# Allegro board WaRP7_IO_Rev10_20151118_0911.brd
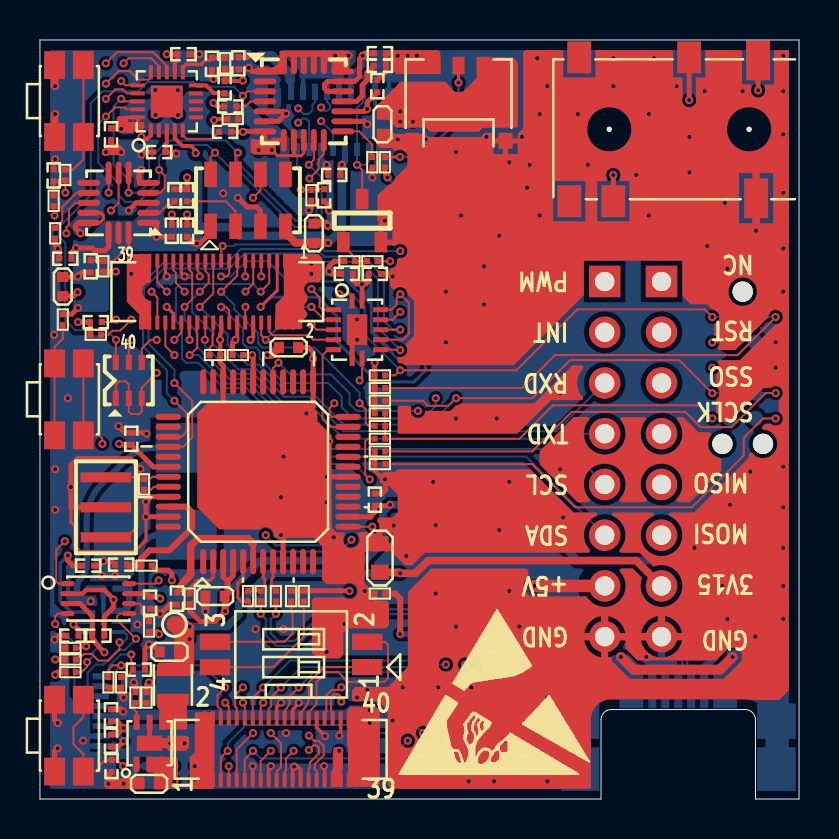
[diagram p0: board, top side]
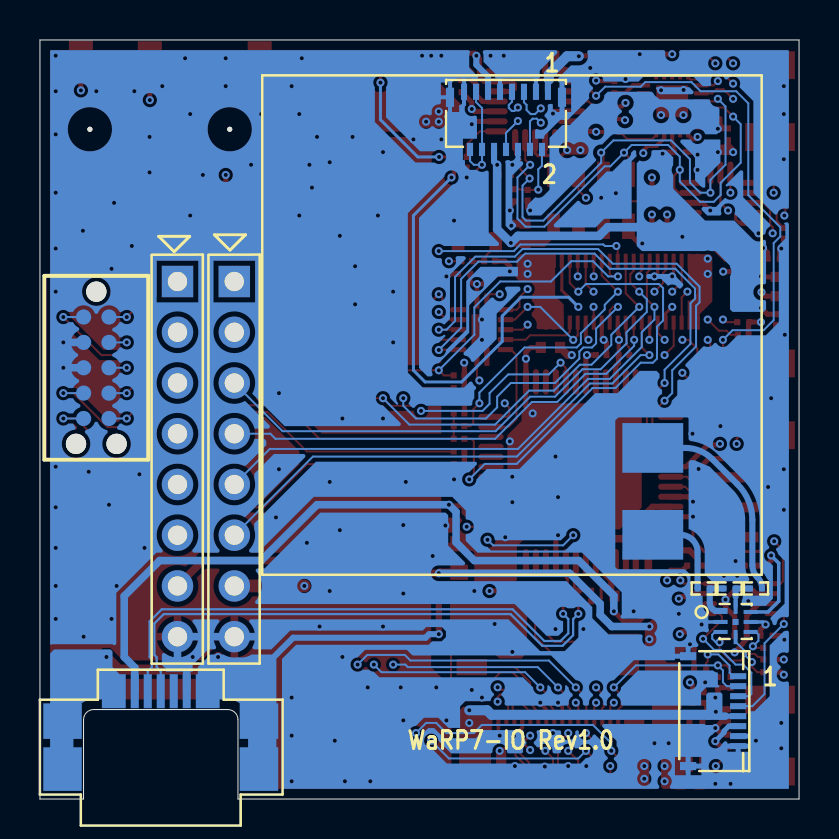
[diagram p1: board, bottom side, seen from below]

Outline 38 x 38 mm; copper layers: TOP, GND02, ART03, ART04, POWER05, BOTTOM. Coordinates in mm from the lower left corner of the outline.
Outline path: 0,38 0,0 28.09,0 28.09,3.97 arc(28.24,4.33) 28.6,4.48 35.31,4.48 arc(35.67,4.33) 35.82,3.97 35.82,0 38,0 38,38 0,38

## Design rules (mm)
net group DIFFPAIR0: nets USB_DN USB_DP
net group DIFFPAIR1: nets N16813663 N16813666
net group I2C: nets I2C4_SCL I2C4_SDA
net group /MISC: nets ACC_INT_B ALT_INT_B AUDIO_SAI1_MCLK AUDIO_SAI1_RXD AUDIO_SAI1_TXC AUDIO_SAI1_TXD AUDIO_SAI1_TXFS BOOT_MODE0 BOOT_MODE1 BYP_CAP DBG_DA DBG_XTIN DBG_XTOUT DEBUG_V50 DSI_RESET FT_RX1 FT_RX2 FT_TX1 FT_TX2 GY_INT_B I2C2_SCL I2C2_SDA I2C3_SCL I2C3_SDA JT_PWR JTAG_MOD JTAG_TCK JTAG_TDI JTAG_TDO JTAG_TMS JTAG_TRST_B MKBUS_ESPI3_MISO MKBUS_ESPI3_MOSI MKBUS_ESPI3_SCLK MKBUS_ESPI3_SS0_B MKBUS_INT MKBUS_PWM2 MKBUS_RST MKBUS_UART5_RXD MKBUS_UART5_TXD NOBAT NTAG_FD_INT PERI_3V15 PMIC_5V0 PMIC_PWR PMIC_PWRON POR_B SENSOR_INT_B SW2_1V8 TOUCH_INT_B TOUCH_RESET_B TOUCH_SCL TOUCH_SDA UART1_RXD UART1_TXD UART2_RXD UART2_TXD USB_SUSPEND1_B USB_SUSPEND2_B USER_PB1
net group /NET: nets N02561 N02599 N02611 N02693 N03151 N03245 N06963 N07207 N07451 N07517 N07733 N07793 N07879 N25723 N42947 N16791037 N16791073 N16799887 N16799903 N16799916 N16800010 N16800012 N16803330 N16803334 N16806132 N16889730
net group /PWR: nets 3V3OUT GND VBAT VREGD
net group AUDIO: nets HPL_OUT HPR_OUT MIC MIC_BIAS N25169

## Placement (name value [footprint] x y rotation side)
ANT1  NFC_ANTENNA  [ANTS2_250X250]  14.37 23.73 270 bottom
C1  10uF  [C0402]  12.45 22.61 0 top
C2  100nF  [C0201]  4.57 18.03 90 top
C3  100nF  [C0201]  16.76 14.99 90 top
C4  100nF  [C0201]  4.06 11.73 180 top
C5  100nF  [C0201]  15.37 26.29 180 top
C6  1uF  [C0201]  16.76 26.29 0 top
C7  4.7uF  [C0402]  8.76 10.16 180 top
C8  100nF  [C0201]  6.86 10.03 270 top
C11  4.7uF  [C0402]  5.46 0.76 180 top
C12  10uF  [C0402]  6.48 7.37 180 top
C13  100nF  [C0201]  2.54 26.67 90 top
C14  4.7uF  [C0402]  1.14 25.65 270 top
C15  100nF  [C0201]  1.27 27.05 180 top
C16  100nF  [C0201]  6.6 28.45 90 top
C17  10uF  [C0402]  13.72 28.32 90 top
C18  100nF  [C0201]  7.37 30.23 90 top
C19  100nF  [C0201]  7.37 28.45 90 top
C20  100nF  [C0201]  6.73 30.23 90 top
C21  100nF  [C0201]  2.79 23.88 180 top
C22  100nF  [C0201]  16.89 35.69 90 top
C23  1uF  [C0201]  17.02 37.34 0 top
C24  100nF  [C0201]  9.53 34.67 180 top
C25  100nF  [C0201]  17.02 36.7 0 top
C26  22uF  [C0603]  17.02 12.06 90 top
C27  100nF  [C0201]  3.56 33.27 270 top
C28  100nF  [C0201]  5.97 32.38 180 top
C29  100nF  [C0201]  9.25 35.64 270 top
C30  100nF  [C0201]  0.69 31.22 90 top
C31  100nF  [C0201]  7.19 37.29 0 top
C32  1uF  [C0201]  8.61 36.8 270 top
C33  100nF  [C0201]  9.27 33.4 0 top
C35  100nF  [C0201]  14.73 31.24 180 top
C36  100nF  [C0201]  3.56 4.19 270 top
C37  100nF  [C0201]  3.56 2.92 90 top
C40  100nF  [C0201]  4.95 6.48 0 top
C41  100nF  [C0201]  9.93 36.83 270 top
C43  100nF  [C0201]  14.22 30.23 270 top
C44  100nF  [C0201]  5.51 9.83 270 top
C45  100nF  [C0201]  2.92 8.18 0 top
C46  10uF  [C0402]  17.14 33.78 270 top
C47  100nF  [C0201]  1.63 8.18 180 top
C48  100pF  [C0201]  4.77 10.54 180 bottom
C49  13pF  [C0201]  3.48 10.54 180 bottom
C50  100pF  [C0201]  2.16 10.54 0 bottom
C51  100nF  [C0201]  2.41 11.68 0 top
C52  100nF  [C0201]  3.58 1.65 270 top
D1  BAT54TW-7-F  [SOT363_6]  4.45 20.95 0 top
J1  CONN_USB_OTG  [USBS5_6PF]  31.95 2.22 180 bottom
J2  CONN_JTAG  [CONS2X5_3J]  35.18 21.59 270 bottom
J3  FH2543-08GT10  [H8M]  31.11 17.02 270 bottom
J4  FH2543-08GT10  [H8M]  28.27 17.02 270 bottom
J5  CONN_AUDIO  [JHP-323S-SMT]  38 33.53 180 top
J7  CONN_DSI  [FPC15_2P6]  14.67 34.25 0 bottom
J8  CONN_TOUCH  [FPC8_2P5]  4.4 4.4 270 bottom
J9  CONN_BAT  [CONS3_2B53X51I]  20.95 34.85 0 top
J10  CONN_B2B1  [FPC2X20_0P4]  12.05 2.49 0 top
J11  CONN_B2B_2  [FPC2X20_0P4]  8.88 25.4 180 top
L1  2.2uH  [L20X16]  6.65 5.71 90 top
NOREF  -  []  -135.8 -70.91 90 top
NOREF#2  -  []  22.86 4.45 0 top
NOREF#3  -  []  -137.8 -68.91 0 top
NOREF#4  -  []  89.42 -56.27 0 top
NOREF#5  -  []  4.63 -11.7 0 top
NOREF#6  -  []  0 0 0 top
NOREF#7  -  []  0 0 90 top
NOREF#8  -  []  0 0 0 top
NOREF#9  -  []  0 0 90 top
Q5  2N7002  [SOT23_123]  16.13 28.96 0 top
R1  470R  [R0201]  5.33 11.68 180 top
R2  27R  [R0201]  11.81 10.16 90 top
R3  27R  [R0201]  11.05 10.16 90 top
R4  1K  [R0201]  10.41 10.16 90 top
R5  0R  [R0201]  17.02 10.29 0 top
R6  1M  [R0201]  5.21 15.75 90 top
R7  10K  [R0201]  9.91 22.23 0 top
R8  10K  [R0201]  7.49 10.03 270 top
R9  10K  [R0201]  17.02 19.3 180 top
R10  10K  [R0201]  17.02 19.94 180 top
R11  10K  [R0201]  17.02 21.21 180 top
R12  0R  [R0201]  17.02 20.57 180 top
R13  430K  [R0201]  5.33 5.08 90 top
R14  0R  [R0201]  17.02 17.4 180 top
R15  4K7  [R0201]  8.76 22.23 0 top
R16  100K  [R0201]  4.78 5.08 270 top
R17  0R  [R0201]  17.02 16.76 180 top
R18  0R  [R0201]  17.02 18.67 0 top
R19  0R  [R0201]  17.02 18.03 0 top
R20  10K  [R0201]  3.17 26.67 270 top
R21  10K  [R0201]  0.76 28.32 270 top
R22  10K  [R0201]  2.79 23.24 180 top
R23  10K  [R0201]  9.65 34.04 0 top
R24  10K  [R0201]  16.64 31.88 270 top
R25  0R  [R0201]  0.69 29.95 90 top
R26  2K2  [R0201]  9.27 36.83 270 top
R27  1K  [R0201]  1.14 24 90 top
R28  10K  [R0201]  3.43 5.84 90 top
R29  10K  [R0201]  4.06 5.84 90 top
R30  10K  [R0201]  13.59 30.23 90 top
R31  10K  [R0201]  5.46 8.64 270 top
R32  100K  [R0201]  1.52 6.35 180 top
R33  2K2  [R0201]  1.52 7.57 180 top
R34  2K2  [R0201]  1.52 6.99 180 top
R35  10K  [R0201]  17.27 31.88 270 top
R36  1K  [R0201]  13.21 10.16 90 top
R37  1K  [R0201]  12.57 10.16 90 top
R38  10K  [R0201]  15.49 26.92 180 top
R39  2K2  [R0201]  16.64 26.92 0 top
R40  1K  [R0201]  1.27 31.24 90 top
S1  EVQP7A01P  [SW4B35X28R]  1.45 34.94 90 top
S2  EVQP7A01P  [SW4B35X28R]  1.45 20.01 90 top
S3  EVQP7A01P  [SW4B35X28R]  1.45 3.17 90 top
SW1  GDH02S04  [SWS4JV]  12.57 8.51 90 top
TP1  TPAD_030  [TP30]  6.73 8.74 90 top
U1  74LVC125ABQ-Q100  [QFN14_1PCQ]  15.88 23.5 270 top
U2  FT2232D  [QFP48P5J]  10.92 16.38 90 top
U3  AP3417CDNTR-G1  [DFN6_1FN]  5.49 2.79 0 top
U4  MPL3115A2  [LGA8IR]  10.41 29.97 90 top
U5  FXOS8700CQR1  [QFNASY16P5R]  3.94 29.84 180 top
U6  FXAS21002CQR1  [QFNASY24P5M]  13.21 34.92 0 top
U7  SGTL5000XNLA3/R2  [QFN20_1PBR]  6.35 34.92 90 top
U8  TXS0102DCUR  [SSOP8CR]  2.92 10.03 0 top
U9  NT3H1101W0FHK  [QFN8_1PCQ]  3.17 8.86 180 bottom
Y1  6.0MHZ  [X3S45X20]  3.3 14.61 270 top

## Library data of the parts
ANT1 = NFC_ANTENNA_0
C1-C8 C11-C33 C35-C37 C40 C41 C43-C52 = CAP NP
D1 = BAT54TW
J1 = USB_MICRO_1
J2 = H10_SMT_1
J3 J4 = HDR1X8
J5 = JACK_JHP-323S-SMT
J7 = FPC15_0
J8 = 2X20PTS TSM-DV SAMTEC_2
J9 = CONN_HDR_2
J10 J11 = 2X20PTS TSM-DV SAMTEC_4
L1 = PINDUCTOR
Q5 = MOSFET_N_0
R1-R40 = RES
S1-S3 = SW PUSHBUTTON_0
SW1 = SW DIP-2/SM
TP1 = TestLoop
U1 = 74LVC125ADB_0
U2 = FT2232D_0
U3 = AP3417CDNTR-G1_0
U4 = MPL3115A2
U5 = FXOS8700CQ_1
U6 = FXAS21002_0
U7 = SGTL5000XNLA3/R2_6
U8 = NT3H1101W0FHK_4
U9 = NT3H1101W0FHK_2
Y1 = XTAL_CS: tolerance: +/-0.1%

## Footprints (pads in the part's own frame, mm; a bottom-side part is the same pattern mirrored in y, then rotated)
ANTS2_250X250
  rect 2.489x3.048 smd: 1(6.15,7.05) 2(10.5,7.05)
C0201
  rect 0.305x0.305 smd: 1(-0.303,0) 2(0.303,0)
C0402
  rect 0.508x0.559 smd: 1(-0.483,0) 2(0.483,0)
C0603
  rect 0.762x0.889 smd: 1(-0.711,0) 2(0.711,0)
CONS2X5_3J
  round 1.016 hole 1.016 unplated: (-3.81,0) (3.81,-1.015) (3.81,1.015)
  round 0.762 smd: 1(-2.54,-0.635) 2(-1.27,-0.635) 3(0,-0.635) 4(1.27,-0.635) 5(2.54,-0.635) 6(2.54,0.635) 7(1.27,0.635) 8(0,0.635) 9(-1.27,0.635) 10(-2.54,0.635)
CONS3_2B53X51I
  rect 0.61x0.864 smd: 1(-1.2,1.875) 2(0,1.875) 3(1.2,1.875)
  rect 0.711x0.813 smd: 4(-2.35,-1.9) 5(2.35,-1.9)
DFN6_1FN
  rect 0.305x0.762 smd: 1(-0.65,-1.05) 2(0,-1.05) 3(0.65,-1.05) 4(0.65,1.05) 5(0,1.05) 6(-0.65,1.05)
  rect 1.27x0.762 smd: 7(0,0)
FPC2X20_0P4
  rect 0.203x0.711 smd: 1(-3.8,-1.546) 2(-3.8,1.546) 3(-3.4,-1.546) 4(-3.4,1.546) 5(-3,-1.546) 6(-3,1.546) 7(-2.6,-1.546) 8(-2.6,1.546) 9(-2.2,-1.546) 10(-2.2,1.546) 11(-1.8,-1.546) 12(-1.8,1.546) 13(-1.4,-1.546) 14(-1.4,1.546) 15(-1,-1.546) 16(-1,1.546) 17(-0.6,-1.546) 18(-0.6,1.546) 19(-0.2,-1.546) 20(-0.2,1.546) 21(0.2,-1.546) 22(0.2,1.546) 23(0.6,-1.546) 24(0.6,1.546) 25(1,-1.546) 26(1,1.546) 27(1.4,-1.546) 28(1.4,1.546) 29(1.8,-1.546) 30(1.8,1.546) 31(2.2,-1.546) 32(2.2,1.546) 33(2.6,-1.546) 34(2.6,1.546) 35(3,-1.546) 36(3,1.546) 37(3.4,-1.546) 38(3.4,1.546) 39(3.8,-1.546) 40(3.8,1.546)
FPC8_2P5
  rect 0.305x0.813 smd: 1(-1.75,1.35) 2(-1.25,1.35) 3(-0.75,1.35) 4(-0.25,1.35) 5(0.25,1.35) 6(0.75,1.35) 7(1.25,1.35) 8(1.75,1.35)
  rect 0.406x0.813 smd: 9(-2.75,-1.156) 10(2.75,-1.156)
FPC15_2P6
  rect 0.305x0.813 smd: 1(-2.1,-1.156) 3(-1.5,-1.156) 5(-0.9,-1.156) 7(-0.3,-1.156) 9(0.3,-1.156) 11(0.9,-1.156) 13(1.5,-1.156) 15(2.1,-1.156)
  rect 0.305x0.66 smd: 2(-1.8,1.73) 4(-1.2,1.73) 6(-0.6,1.73) 8(0,1.73) 10(0.6,1.73) 12(1.2,1.73) 14(1.8,1.73)
  rect 0.406x0.965 smd: 16(-2.803,-0.88) 17(2.803,-0.88)
H8M
  rect 1.575x1.575 hole 0.965: 1(-8.89,0)
  round 1.575 hole 0.965: 2(-6.35,0) 3(-3.81,0) 4(-1.27,0) 5(1.27,0) 6(3.81,0) 7(6.35,0) 8(8.89,0)
JHP-323S-SMT
  round 0.254 hole 1.448 unplated: (2.5,0) (9.5,0)
  rect 1.2x2 smd: 1(2.05,-3.45) 2(2.15,3.45)
  rect 1.2x1.6 smd: 3(5.5,-3.6) 4(9.3,3.6) 5(11,-3.6) 6(11.5,3.6)
L20X16
  rect 0.559x1.6 smd: 1(-0.721,0) 2(0.721,0)
LGA8IR
  rect 1.27x0.635 smd: 1(-1.3,1.875) 2(-1.3,0.625) 3(-1.3,-0.625) 4(-1.3,-1.875) 5(1.3,-1.875) 6(1.3,-0.625) 7(1.3,0.625) 8(1.3,1.875)
QFN8_1PCQ
  rect 0.711x0.305 smd: 1(-0.756,0.551)
  rect 0.711x0.203 smd: 2(-0.756,0) 3(-0.756,-0.5) 5(0.756,-0.5) 6(0.756,0) 7(0.756,0.5)
  rect 0.203x0.711 smd: 4(0,-0.756) 8(0,0.756)
  rect 0.305x0.305 smd: 9(0,0)
QFN14_1PCQ
  rect 0.762x0.254 smd: 1(-1.431,-0.25) 7(1.431,-0.25) 8(1.431,0.25) 14(-1.431,0.25)
  rect 0.254x0.762 smd: 2(-1,-1.181) 3(-0.5,-1.181) 4(0,-1.181) 5(0.5,-1.181) 6(1,-1.181) 9(1,1.181) 10(0.5,1.181) 11(0,1.181) 12(-0.5,1.181) 13(-1,1.181)
  rect 1.524x1.016 smd: 15(0,0)
QFN20_1PBR
  rect 0.711x0.203 smd: 1(-1.456,0.8) 2(-1.456,0.4) 3(-1.456,0) 4(-1.456,-0.4) 5(-1.456,-0.8) 11(1.456,-0.8) 12(1.456,-0.4) 13(1.456,0) 14(1.456,0.4) 15(1.456,0.8)
  rect 0.203x0.711 smd: 6(-0.8,-1.456) 7(-0.4,-1.456) 8(0,-1.456) 9(0.4,-1.456) 10(0.8,-1.456) 16(0.8,1.456) 17(0.4,1.456) 18(0,1.456) 19(-0.4,1.456) 20(-0.8,1.456)
  rect 1.6x1.6 smd: 21(0,0)
QFNASY16P5R
  oval 1.143x0.305 smd: 1(-1.5,1) 2(-1.5,0.5) 3(-1.5,0) 4(-1.5,-0.5) 5(-1.5,-1) 9(1.5,-1) 10(1.5,-0.5) 11(1.5,0) 12(1.5,0.5) 13(1.5,1)
  oval 0.305x1.143 smd: 6(-0.5,-1.5) 7(0,-1.5) 8(0.5,-1.5) 14(0.5,1.5) 15(0,1.5) 16(-0.5,1.5)
QFNASY24P5M
  oval 1.143x0.305 smd: 1(-1.95,1.5) 2(-1.95,1) 3(-1.95,0.5) 4(-1.95,0) 5(-1.95,-0.5) 6(-1.95,-1) 7(-1.95,-1.5) 13(1.95,-1.5) 14(1.95,-1) 15(1.95,-0.5) 16(1.95,0) 17(1.95,0.5) 18(1.95,1) 19(1.95,1.5)
  oval 0.305x1.143 smd: 8(-1,-1.95) 9(-0.5,-1.95) 10(0,-1.95) 11(0.5,-1.95) 12(1,-1.95) 20(1,1.95) 21(0.5,1.95) 22(0,1.95) 23(-0.5,1.95) 24(-1,1.95)
QFP48P5J
  oval 1.27x0.305 smd: 1(-4.5,2.75) 2(-4.5,2.25) 3(-4.5,1.75) 4(-4.5,1.25) 5(-4.5,0.75) 6(-4.5,0.25) 7(-4.5,-0.25) 8(-4.5,-0.75) 9(-4.5,-1.25) 10(-4.5,-1.75) 11(-4.5,-2.25) 12(-4.5,-2.75) 25(4.5,-2.75) 26(4.5,-2.25) 27(4.5,-1.75) 28(4.5,-1.25) 29(4.5,-0.75) 30(4.5,-0.25) 31(4.5,0.25) 32(4.5,0.75) 33(4.5,1.25) 34(4.5,1.75) 35(4.5,2.25) 36(4.5,2.75)
  oval 0.305x1.27 smd: 13(-2.75,-4.5) 14(-2.25,-4.5) 15(-1.75,-4.5) 16(-1.25,-4.5) 17(-0.75,-4.5) 18(-0.25,-4.5) 19(0.25,-4.5) 20(0.75,-4.5) 21(1.25,-4.5) 22(1.75,-4.5) 23(2.25,-4.5) 24(2.75,-4.5) 37(2.75,4.5) 38(2.25,4.5) 39(1.75,4.5) 40(1.25,4.5) 41(0.75,4.5) 42(0.25,4.5) 43(-0.25,4.5) 44(-0.75,4.5) 45(-1.25,4.5) 46(-1.75,4.5) 47(-2.25,4.5) 48(-2.75,4.5)
R0201
  rect 0.305x0.305 smd: 1(-0.267,0) 2(0.267,0)
SOT23_123
  rect 0.635x1.016 smd: 1(-0.94,-1.079) 2(0.94,-1.079) 3(0,1.079)
SOT363_6
  rect 0.305x0.762 smd: 1(-0.65,-0.9) 2(0,-0.9) 3(0.65,-0.9) 4(0.65,0.9) 5(0,0.9) 6(-0.65,0.9)
SSOP8CR
  oval 0.711x0.254 smd: 1(-1.544,0.75) 2(-1.544,0.25) 3(-1.544,-0.25) 4(-1.544,-0.75) 5(1.544,-0.75) 6(1.544,-0.25) 7(1.544,0.25) 8(1.544,0.75)
SW4B35X28R
  rect 1.397x1.041 smd: 1(-1.799,0.721) 2(-1.799,-0.721) 3(1.799,0.721) 4(1.799,-0.721)
SWS4JV
  rect 0.813x1.524 smd: 1(-1.905,-3.81) 2(-0.635,-3.81) 3(-0.635,3.81) 4(-1.905,3.81)
TP30
  round 0.762 smd: 1(0,0)
USBS5_6PF
  rect 0.406x1.702 smd: 1(-1.3,3.174) 2(-0.65,3.174) 3(0,3.174) 4(0.65,3.174) 5(1.3,3.174)
  rect 1.194x1.702 smd: 6(-2.35,3.174) 7(2.35,3.174)
  rect 1.93x1.778 smd: 8(-4.915,1.675) 9(4.915,1.675)
  rect 1.93x2.184 smd: 10(-4.915,-0.725) 11(4.915,-0.725)
X3S45X20
  rect 0.508x2.54 smd: 1(-1.5,0) 2(0,0) 3(1.5,0)

## Nets
3V3OUT: C8.1 U2.6(3V3OUT)
GND: C1.2 C2.2 C3.2 C4.2 C5.2 C6.2 C7.2 C8.2 C11.2 C12.2 C14.2 C15.2 C16.2 C17.2 C18.2 C19.2 C20.2 C21.2 C22.2 C23.2 C24.2 C25.2 C26.2 C27.2 C28.2 C30.2 C31.2 C32.2 C33.2 C35.2 C36.2 C37.2 C40.2 C41.2 C43.2 C44.2 C45.2 C46.2 C47.2 C51.2 C52.2 J1.5(P5) J2.2(GND#2) J2.3(GND#3) J3.8 J4.8 J5.2(RING2/GND) J7.3(GND4) J7.6(GND3) J7.9(GND2) J7.15(GND1) J7.16 J7.17 J8.7 J8.8 J8.9 J8.10 J9.1 J9.4 J9.5 J10.13 J10.17 J10.20 J10.23 J10.24 J10.25 J10.30 J10.31 J10.36 J11.12 J11.16 J11.20 J11.28 J11.29 J11.32 J11.33 Q5.2(SOURCE) R5.1 R7.1 R14.2 R15.2 R16.1 R17.2 R20.2 R21.2 R22.2 R24.2 R38.2 S1.1 S1.3 S3.1 S3.3 U1.7(GND) U1.15(PAD) U2.9(GND#9) U2.18(GND#18) U2.25(GND#25) U2.34(GND#34) U2.45(AGND) U2.47(TEST) U3.5(GND) U3.7(PAD) U4.3(GND) U5.3(RESERVED1) U5.5(GND#5) U5.12(GND#12) U5.13(RESERVED2) U6.1(GND#1) U6.5(GND#5) U6.6(RESERVED1) U6.7(RESERVED2) U6.8(IIC_B/SPI) U6.9(RESERVED3) U6.10(RESERVED4) U6.14(GND#14) U6.19(GND#19) U6.20(RESERVED5) U6.21(RESERVED6) U6.22(RESERVED7) U6.23(RESERVED8) U6.24(RESERVED9) U7.21(PAD) U8.2(GND) U9.2(VSS) Y1.2
VBAT: C46.1 J9.3 J11.1 J11.2 J11.3 J11.4 J11.6
ACC_INT_B: D1.5(C2) U5.11(INT1)
ALT_INT_B: D1.4(C1) U4.6(INT1)
AUDIO_SAI1_MCLK: J11.30 U7.13(I2S_MCLK)
AUDIO_SAI1_RXD: J11.35 U7.16(I2S_DOUT)
AUDIO_SAI1_TXC: J11.31 U7.15(I2S_SCLK)
AUDIO_SAI1_TXD: J11.36 U7.17(I2S_DIN)
AUDIO_SAI1_TXFS: J11.34 U7.14(I2S_LRCLK)
BOOT_MODE0: J10.28 SW1.2(A2)
BOOT_MODE1: J10.26 SW1.1(A1)
BYP_CAP: C20.1 U5.2(BYP)
DBG_DA: R8.1 U2.2(EEDATA)
DBG_XTIN: R6.2 U2.43(XTIN) Y1.1
DBG_XTOUT: R6.1 U2.44(XTOUT) Y1.3
DEBUG_V50: C1.1 C2.1 C3.1 C7.1 J1.1(P1) R1.1 R7.2 R8.2 U2.3(VCC#3) U2.4(RESET_B) U2.14(VCCIOA) U2.31(VCCIOB) U2.42(VCC#42)
DSI_RESET: C43.1 J7.2(RESET) R30.2
FT_RX1: U1.6(2Y) U2.23(ADBUS1)
FT_RX2: U1.11(4Y) U2.39(BDBUS1)
FT_TX1: U1.2(1A) U2.24(ADBUS0)
FT_TX2: U1.9(3A) U2.40(BDBUS0)
GY_INT_B: D1.6(C3) U6.3(INT1)
HPL_OUT: J5.4(TIP/HPL) U7.4(HP_L)
HPR_OUT: J5.3(RING1/HPR) U7.1(HP_R)
I2C2_SCL: J11.14 R34.1 U8.1(B2) U9.3(SCL)
I2C2_SDA: J11.13 R33.1 U8.8(B1) U9.5(SDA)
I2C3_SCL: J4.5 J11.27
I2C3_SDA: J4.6 J11.26
I2C4_SCL: J10.8 U4.8(SCL) U5.4(SCL/SCLK) U6.11(SCL/SCLK) U7.19(CTRL_CLK)
I2C4_SDA: J10.7 U4.7(SDA) U5.6(SDA/MOSI) U6.12(SDA/MOSI) U7.18(CTRL_DATA)
JT_PWR: J2.1(VCC) R12.1
JTAG_MOD: J11.22 R15.1
JTAG_TCK: J2.9(TCK) J11.18
JTAG_TDI: J2.7(NC/TDI) J11.21 R10.1
JTAG_TDO: J2.8(TDO) J11.19
JTAG_TMS: J2.10(TMS) J11.17 R11.1
JTAG_TRST_B: J11.15 R18.1
LCD_BK_CTL: J10.5 R39.2
LEDK: J7.12(LEDK1) J7.13(LEDK2) J7.14(LEDK3) Q5.3(DRAIN)
MIC: C29.2 U7.10(MIC)
MIC_BIAS: C32.1 R26.1 U7.11(MIC_BIAS)
MIPI_DSI_CLK_N: J7.8(CLK-) J10.34
MIPI_DSI_CLK_P: J7.7(CLK+) J10.32
MIPI_DSI_D0_N: J7.5(D0-) J10.29
MIPI_DSI_D0_P: J7.4(D0+) J10.27
MKBUS_ESPI3_MISO: J3.5 J10.19
MKBUS_ESPI3_MOSI: J3.6 J10.16
MKBUS_ESPI3_SCLK: J3.4 J10.15
MKBUS_ESPI3_SS0_B: J3.3 J10.14
MKBUS_INT: J4.2 J10.21
MKBUS_PWM2: J4.1 J10.22
MKBUS_RST: J3.2 J10.18
MKBUS_UART5_RXD: J4.3 J11.23
MKBUS_UART5_TXD: J4.4 J11.24
MX7_ONOFF: C52.1 J11.9 S3.2 S3.4
NOBAT: J11.5 R35.2
NTAG_FD_INT: J11.11 R32.1 U9.4(FD)
PERI_3V15: C5.1 C6.1 C12.1 C13.1 C14.1 C15.1 C16.1 C17.1 C19.1 C22.1 C23.1 C26.1 C28.1 C31.1 C35.1 C37.1 C44.1 C47.1 J3.7 J7.10(VCC) J7.11(LEDA) J8.6 J10.1 J10.2 J10.3 J10.4 L1.2 R13.2 R23.1 R27.2 R32.2 R33.2 R34.2 TP1.1(PIN1) U1.14(VCC) U4.1(VDD) U4.4(VDDIO) U5.1(VDDIO) U5.14(VDD) U6.15(VDD) U6.17(SPI_CS_B) U6.18(VDDIO) U7.3(VDDA) U7.12(VDDIO) U8.7(VCCB) U9.6(VCC)
PMIC_5V0: J4.7 J10.33 J10.35
PMIC_PWR: C11.1 J11.37 J11.38 J11.39 J11.40 U3.2(EN) U3.3(VIN)
PMIC_PWRON: C30.1 J11.25 R25.2 R40.1
POR_B: J11.7 R19.1 R25.1
SENSOR_INT_B: D1.1(A1) D1.2(A2) D1.3(A3) J10.10
SW2_1V8: C27.1 C36.1 C41.1 C45.1 J7.1(IOVCC) J8.5 J10.37 J10.38 J10.39 J10.40 R9.2 R10.2 R11.2 R12.2 R28.1 R29.1 R30.1 R31.2 R36.2 R37.2 U7.20(VDDD) U8.3(VCCA)
TOUCH_INT_B: J8.2 J10.6 R28.2
TOUCH_RESET_B: C40.1 J8.1 R29.2
TOUCH_SCL: J8.4 U8.4(A2)
TOUCH_SDA: J8.3 U8.5(A1)
UART1_RXD: J11.10 U1.3(1Y)
UART1_TXD: J11.8 U1.5(2A)
UART2_RXD: J10.12 U1.8(3Y)
UART2_TXD: J10.11 U1.12(4A)
USB_DN: R2.2 U2.8(USBDN)
USB_DP: R3.2 R4.2 U2.7(USBDP)
USB_SUSPEND1_B: U1.1(O\E\1) U1.4(O\E\2) U2.13(ACBUS1)
USB_SUSPEND2_B: U1.10(O\E\3) U1.13(O\E\4) U2.29(BCBUS1)
USER_PB1: J10.9 S2.2 S2.4
VREGD: C25.1 U6.16(VREGD)
N02561: J1.6(SHLD1) J1.7(SHLD3) J1.8(SHLD2) J1.9(SHLD4) J1.10(SHLD5) J1.11 R5.2
N02599: J2.4(KEY) R14.1
N02611: J2.5(GND#5) R17.1
N02693: J2.6(NRET) R9.1 R18.2 R19.2
N03151: C4.1 R1.2 U2.46(AVCC)
N03245: R4.1 U2.5(RSTOUT_B)
N06963: C24.1 R23.2 U6.4(RST_B)
N07207: C21.1 U5.8(CRST)
N07451: C13.2 R20.1 U5.16(RST)
N07517: C18.1 U4.2(CAP)
N07733: R22.1 U5.7(SA0/MISO)
N07793: R21.1 U5.10(SA1/CS_B)
N07879: R24.1 U6.13(SA0/MISO)
N25169: C29.1 J5.1(SLEEVE) R26.2
N25723: C33.1 U7.5(VAG)
N42947: R27.1 S2.1 S2.3
N43245: R40.2 S1.2 S1.4
N16791037: L1.1 U3.4(LX)
N16791073: R13.1 R16.2 U3.6(FB)
N16799887: C48.2 C49.1 U9.1(LA)
N16799903: C49.2 C50.2 U9.8(LB)
N16799916: C51.1 U9.7(VOUT)
N16800010: ANT1.2 C48.1
N16800012: ANT1.1 C50.1
N16803330: R36.1 SW1.4(B1)
N16803334: R37.1 SW1.3(B2)
N16806132: R31.1 U8.6(CE)
N16813663: J1.2(P2) R2.1
N16813666: J1.3(P3) R3.1
N16877166: Q5.1(GATE) R38.1 R39.1
N16889730: J9.2 R35.1

Pads without a net: J1 4; J3 1; J5 5 6; U2 1 10 11 12 15 16 17 19 20 21 22 26 27 28 30 32 33 35 36 37 38 41 48; U3 1; U4 5; U5 9 15; U6 2; U7 2 6 7 8 9; U9 9

## Via types
v1: diameter 0.406, hole 0.203, TOP to BOTTOM, 379 vias

## Routing (per net, layer and track width the routed paths; a pad name or vN(x,y) marks a point on that pad's centre or on a via; arc(x,y) is an arc through that point)
3V3OUT: length 6.9
  TOP w0.254: C8.1 7.01,10.49 7.01,10.69 7.18,10.86 ; U2.6 10.67,12.77
  TOP w0.381: 10.67,12.77 10.41,13.03 7.9,13.03 7.54,12.67 7.54,11.23 7.18,10.86
GND: length 222.2
  TOP w0.152: 12.64,32.21 12.71,32.28 ; 12.64,32.21 13.08,32.21 13.21,32.33 U6.10 ; 12.64,32.21 11.89,32.21 v1(11.61,32.49) ; U5.13 2.99,28.85 3.17,29.03 3.17,29.21 3.04,29.35 U5.12 ; v1(6.35,26.16) 6.28,26.23 J11.33 ; v1(6.35,24.64) 6.68,24.31 J11.32 ; J11.29 7.08,26.32 v1(7.24,26.16) ; v1(5.31,14.13) 5.31,12.95 4.75,12.4 2.01,12.4 1.75,12.65 1.75,13.67 1.55,13.87 1.55,14.61 ; v1(7.49,22.99) 7.48,23 J11.28
  TOP w0.178: J10.36 15.05,3.24 v1(14.99,3.17) ; J10.25 13.05,1.48 12.9,1.63 v1(12.73,1.63) 12.65,1.55 J10.23 ; J10.24 12.65,4.47 12.74,4.56 v1(12.95,4.83) ; J10.31 14.25,1.62 v1(14.22,1.65) ; J10.17 11.45,1.55 v1(11.56,1.65) ; v1(12.06,4.83) 11.85,4.61 J10.20 ; J10.13 v1(10.65,1.65) ; v1(14.27,3.15) 13.85,3.57 J10.30
  TOP w0.203: R17.2 16.75,16.45 17.2,16 v1(17.27,16) ; v1(0.76,32.03) 0.69,31.95 C30.2 ; J11.12 10.68,23.12 v1(10.54,22.99) ; R24.2 v1(16.64,31.11) ; v1(0.89,27.56) 0.76,27.69 R21.2 ; v1(8.69,34.85) 8.86,34.67 C24.2 ; R15.2 9.03,22.97 v1(9.02,22.99) 9.02,23.28 9.08,23.34 J11.20 ; J11.16 9.88,23.09 v1(9.78,22.99) ; 12.71,32.28 U6.9 ; C33.2 v1(10.16,33.4)
  TOP w0.229: v1(3.68,9.98) 3.68,10.01 3.23,10.46 2.31,10.46 2.13,10.28 U8.2
  TOP w0.254: R7.1 9.64,22.85 v1(9.78,22.99) ; C1.2 13.44,22.61 13.67,22.37 v1(13.67,22.04) U2.25 13.67,19.64 v1(13.34,19.3) ; 17.3,15.82 17.3,15.47 17.12,15.29 C3.2 ; v1(7.37,31.11) C18.2 C20.2 ; C16.2 v1(6.6,29.26) ; C15.2 0.97,27.48 v1(0.89,27.56) ; C32.2 8.61,36.12 v1(8.69,36.04) ; 11.26,32.89 U6.7 10.18,33.42 v1(10.16,33.4) ; v1(9.91,30.1) 10.36,29.64 10.85,29.64 11.04,29.45 U4.3 ; v1(17.27,28.96) 17.07,28.75 Q5.2 17.77,27.88 ; v1(14.35,31.75) 14.43,31.67 C35.2 ; C45.2 3.22,9.14 3.68,9.6 v1(3.68,9.98) ; v1(0.74,7.98) 0.94,8.18 C47.2 ; C36.2 3.86,3.89 v1(4.19,3.56) 3.86,3.22 C37.2 ; R20.2 v1(3.8,26.4) ; C19.2 v1(7.37,29.26) ; v1(14.48,29.46) 14.48,29.67 C43.2 ; 16.38,10.29 R5.1 16.75,9.87 ; C40.2 5.26,7.54 v1(5.46,7.75) 5.61,7.75 C12.2 ; Y1.2 1.55,14.61 v1(1.55,15.62) 1.55,16.71 1.88,17.04 4.52,17.04 5.03,16.54 v1(5.03,16.52) ; 23.31,32.16 J9.5 ; J9.5 22.57,32.95 ; J9.5 24.04,32.95 ; v1(5.08,32.26) 5.21,32.38 C28.2 ; U6.5 12.21,34.43 v1(12.32,34.32) 11.93,33.93 U6.6 ; U3.5 U3.7 ; U6.1 10.63,36.43 v1(10.45,36.6) 10.38,36.53 C41.2 ; v1(12.06,13.21) 12.17,13.1 U2.9 ; v1(16.38,33.78) 16.24,33.93 U6.14 ; v1(2.03,28.32) 1.78,28.57 1.78,28.7 1.92,28.85 U5.13 ; R14.2 R17.2 ; 9.17,19.59 U2.34 9.17,21.69 9.03,21.83 R15.2 ; C5.2 14.61,26.29 v1(14.48,26.42) 14.48,26.67 14.73,26.92 R38.2 ; C6.2 17.53,26.29 v1(17.65,26.16) ; U2.18 v1(14.36,16.13) ; v1(3.43,0.76) 3.43,1.2 C52.2 ; R16.1 4.78,5.77 v1(4.7,5.84) ; v1(1.91,23.88) C21.2 2.53,23.84 R22.2 ; C31.2 v1(7.98,37.29) ; S3.3 0.73,3.97 v1(0.89,3.81) ; C22.2 17.32,36.42 C25.2 C23.2 17.78,37.34 v1(17.91,37.21) ; U5.3 4.83,29.84 v1(4.45,29.46) ; v1(5.33,18.29) 5.29,18.34 C2.2 4.27,18.34 v1(3.94,18.67) ; C14.2 1.68,25.17 v1(1.88,25.37) ; 11.67,32.98 U6.8 ; C4.2 3.58,11.91 v1(3.18,11.91) 2.95,11.68 C51.2 ; U1.7 15.63,22.86 ; C8.2 6.48,9.73 v1(6.02,9.27) 5.76,9.53 C44.2 ; S3.1 0.73,2.38 v1(0.89,2.54) ; U2.47 v1(5.31,14.13) v1(5.31,14.88) 5.56,15.13 U2.45 ; U5.5 5.2,30.84 arc(5.1,30.86) 5.02,30.92 arc(4.97,31) 4.95,31.09 4.95,31.19 arc(4.99,31.36) v1(5.08,31.5)
  TOP w0.381: J4.8 28.27,9.3 ; J4.8 28.27,6.96 ; J4.8 27.1,8.13 ; J4.8 29.44,8.13 ; J3.8 32.28,8.13 ; J3.8 31.11,9.3 ; J3.8 29.95,8.13 ; v1(0.76,35.69) 0.73,35.72 S1.3 ; v1(35.85,28.45) J5.2 35.85,31.46 ; C17.2 14.3,28.8 v1(14.4,28.7) ; S1.1 0.73,34.26 v1(0.76,34.29) ; v1(8.28,9.4) C7.2
  TOP w0.508: U3.7 v1(6.53,2.79)
  GND02 w0.381: J4.8 29.44,8.13 ; J4.8 28.27,9.3 ; J4.8 28.27,6.96 ; J4.8 27.1,8.13 ; 29.95,8.13 J3.8 ; J3.8 31.11,6.96 ; J3.8 31.11,9.3 ; J3.8 32.28,8.13
  ART03 w0.102: v1(11.61,32.49) 11.51,32.38 11.51,27.99 11.94,27.56 11.94,22.4 12.4,21.95 12.4,21.31 12.32,21.23 ; 9.83,35.59 10.46,35.59 ; 13.28,5.89 13.34,5.84 13.34,5.31 13.28,5.26
  ART03 w0.203: 10.46,35.59 11.13,35.59 11.96,36.42 19.66,36.42 19.86,36.22 ; v1(10.45,36.6) 10.46,36.6 11.13,36.6 11.73,37.21 v1(14.78,37.21) v1(15.44,37.21) ; 16.89,34.92 16.74,35.08 15.77,35.08 15.62,34.92 ; 20.45,34.47 19.15,35.76 12.34,35.76 11,34.42 9.27,34.42 ; 14.86,34.92 14.71,35.08 13.54,35.08 13.36,34.9
  ART03 w0.381: 31.11,6.96 J3.8 ; J3.8 29.95,8.13 ; J3.8 31.11,9.3 ; J3.8 32.28,8.13 ; J4.8 29.44,8.13 ; J4.8 27.1,8.13 ; J4.8 28.27,9.3 ; J4.8 28.27,6.96
  ART04 w0.254: 27.1,8.13 J4.8 ; J4.8 29.44,8.13 ; J4.8 28.27,6.96 ; J4.8 28.27,9.3 ; J3.8 32.28,8.13 ; J3.8 31.11,6.96 ; J3.8 29.95,8.13 ; J3.8 31.11,9.3
  POWER05 w0.102: 4.39,17.65 4.01,17.27
  POWER05 w0.381: 31.11,6.96 J3.8 ; J3.8 31.11,9.3 ; J3.8 32.28,8.13 ; J3.8 29.95,8.13 ; J4.8 29.44,8.13 ; J4.8 27.1,8.13 ; J4.8 28.27,9.3 ; J4.8 28.27,6.96
  BOTTOM w0.178: v1(4.88,8.74) 4.75,8.86 U9.2
  BOTTOM w0.203: 16.89,34.65 16.77,34.77 J7.15 16.77,36.12 ; 14.97,36.22 J7.9 ; 13.17,36.18 J7.3 ; 17.47,34.24 J7.17 ; J7.17 17.98,35.13 ; J7.17 17.47,35.92
  BOTTOM w0.254: 11.87,34.35 J7.16 11.87,35.89 ; J8.8 3.63,2.65 ; J8.8 2.43,2.65 v1(2.16,2.92) 2.39,3.15 J8.7 ; J8.8 3.05,2.32 ; v1(14.35,31.75) 14.07,32.03 J7.6 ; 5.55,1.07 J8.10 ; J8.10 4.77,1.65 ; J8.10 5.55,2.23 ; 5.55,7.66 J8.9 6.31,7.15
  BOTTOM w0.381: 29.95,8.13 J3.8 31.11,6.96 ; 27.1,8.13 J4.8 29.44,8.13 ; J2.3 v1(36.83,21.59) ; J1.5 30.65,6.81 ; J2.2 v1(36.83,22.86)
  vias: v1(0.71,23.24) v1(0.76,16.51) v1(0.76,14.48) v1(1.4,20.07) v1(2.54,9.91) v1(3.1,11.18) v1(3.3,32.38) v1(3.76,11.18) v1(4.06,32.38) v1(4.19,0.76) v1(5.78,35.5) v1(5.79,34.24) v1(6.91,35.48) v1(6.91,34.24) v1(7.24,2.79) v1(9.17,30.33) v1(10.79,8.51) v1(10.95,32.49) v1(12.06,15.11) v1(12.19,17.14) v1(12.19,8.51) v1(12.32,3.3) v1(14.35,14.86) v1(14.35,7.37) v1(14.48,17.91) v1(14.71,13.11) v1(15.24,8.76) v1(15.88,24) v1(15.88,22.99) v1(15.88,5.08) v1(16.26,10.41) v1(16.38,5.46) v1(17.7,13.69) v1(17.65,3.94) v1(17.91,33.02) v1(18.16,5.59) v1(18.34,12.17) v1(18.41,37.21) v1(18.87,37.21) v1(19.3,33.02) v1(19.68,15.88) v1(19.81,13.72) v1(19.81,10.29) v1(19.81,3.94) v1(19.94,5.59) v1(20.32,25.4) v1(20.32,22.86) v1(20.83,32.38) v1(20.83,19.05) v1(20.83,8.64) v1(21.08,29.21) v1(21.46,0.89) v1(21.59,5.59) v1(22.23,26.67) v1(22.23,24.77) v1(22.35,33.15) v1(22.73,0.89) v1(22.86,19.05) v1(22.86,7.11) v1(22.99,28.19) v1(22.99,13.46) v1(23.24,2.92) v1(23.5,31.88) v1(23.5,15.88) v1(23.5,10.41) v1(24,8.64) v1(24.13,33.15) v1(24.38,30.61) v1(24.51,31.75) v1(24.64,12.83) v1(24.89,37.08) v1(25.02,34.29) v1(25.02,29.21) v1(25.4,35.69) v1(25.4,5.08) v1(25.4,3.17) v1(25.4,0.89) v1(26.04,20.32) v1(26.04,16.51) v1(26.19,14.1) v1(26.92,34.29) v1(27.43,31.75) v1(28.7,37.08) v1(28.7,35.69) v1(29.84,31.24) v1(30.35,7.11) v1(30.48,34.29) v1(30.48,29.21) v1(30.73,37.08) v1(31.88,35.69) v1(32.51,33.15) v1(32.51,31.37) v1(32.77,12.57) v1(33.02,16.26) v1(33.27,35.43) v1(33.4,27.69) v1(34.16,10.67) v1(34.29,29.84) v1(34.42,26.54) v1(34.42,9.02) v1(34.54,14.73) v1(35.18,35.43) v1(35.56,16.38) v1(35.81,8.13) v1(37.21,37.21) v1(37.21,35.43) v1(37.21,33.27) v1(37.21,30.35) v1(37.21,27.56) v1(37.21,25.4) v1(37.21,16.64) v1(37.21,14.61) v1(37.21,12.57) v1(37.21,10.67) v1(37.21,9.02)
VBAT:
  vias: v1(13.59,26.8) v1(13.59,26.29) v1(18.03,34.42) v1(18.03,33.91) v1(18.67,33.91)
ACC_INT_B: length 12.4
  TOP w0.102: U5.11 1.78,29.84 1.45,29.51 1.45,28.75 1.32,28.63 v1(1.32,28.32) ; D1.5 4.45,22.86 v1(4.57,22.99)
  ART03 w0.102: v1(4.57,22.99) 4.19,22.61 2.54,22.61 0.79,24.36 0.79,26.77 1.32,27.3 v1(1.32,28.32)
ALT_INT_B: length 13.2
  TOP w0.102: v1(10.67,30.1) 11.04,30.47 U4.6 ; v1(5.84,22.99) 5.54,22.99 5.1,22.55 D1.4
  ART03 w0.102: v1(10.67,30.1) 10.67,27.94 9.73,27 8.28,27 7.62,26.34 7.62,24.33 7.26,23.98 6.83,23.98 v1(5.84,22.99)
AUDIO_SAI1_MCLK: length 23.3
  TOP w0.102: v1(6.73,22.99) 7.08,23.33 J11.30 ; v1(3.3,36.83) 3.86,37.39 5.66,37.39 6.35,36.7 U7.13
  ART03 w0.102: v1(3.3,36.83) 1.91,35.43 1.91,31.78 2.69,30.99 2.69,28.93 3.35,28.27 3.35,23.92 3.68,23.6 4.95,23.6 5.36,23.18 5.36,22.81 5.59,22.58 6.32,22.58 v1(6.73,22.99)
AUDIO_SAI1_RXD: length 15.7
  TOP w0.102: v1(6.35,25.4) 5.88,25.87 J11.35 ; U7.16 4.28,35.73 v1(4.06,35.94)
  ART03 w0.102: v1(6.35,25.4) 5.92,25.83 5.92,27.51 5.23,28.19 5.23,30.58 4.14,31.67 3.45,31.67 2.92,32.21 2.92,34.34 3.17,34.59 3.51,34.59 3.68,34.77 3.68,35.56 v1(4.06,35.94)
AUDIO_SAI1_TXC: length 19.3
  TOP w0.102: v1(7.24,25.4) 6.81,25.83 6.81,26.34 6.68,26.47 J11.31 ; v1(3.3,35.81) 3.94,36.45 4.5,36.45 4.93,36.02 5.44,36.02 5.55,36.13 U7.15
  ART03 w0.102: v1(7.24,25.4) 6.86,25.02 5.38,25.02 5.21,25.2 5.21,27.48 4.64,28.05 4.64,28.66 4.01,29.29 4.01,30.33 2.31,32.03 2.31,34.82 v1(3.3,35.81)
AUDIO_SAI1_TXD: length 15.1
  TOP w0.102: v1(5.59,25.4) 5.88,25.11 J11.36 ; U7.17 4.35,35.33 4.14,35.53 3.78,35.53 v1(3.3,35.05)
  ART03 w0.102: v1(5.59,25.4) 5.59,27.46 4.98,28.07 4.98,30.43 4.11,31.29 3.48,31.29 2.59,32.18 2.59,34.34 v1(3.3,35.05)
AUDIO_SAI1_TXFS: length 25.2
  TOP w0.102: U7.14 5.95,36.7 5.56,37.08 4.45,37.08 v1(4.19,36.83) ; v1(6.73,22.23) 6.28,22.68 J11.34
  ART03 w0.102: v1(6.73,22.23) 5.36,22.23 5,22.58 5,23.09 4.73,23.37 3.23,23.37 2.87,23.72 2.87,25.76 2.69,25.94 2.69,28.22 2.24,28.68 2.24,30.78 1.47,31.55 1.47,35.76 3.1,37.39 3.63,37.39 v1(4.19,36.83)
BOOT_MODE0: length 8.8
  TOP w0.102: SW1.2 17.27,7.87 17.42,7.72 17.42,6.05 17.25,5.87 15.42,5.87 14.94,6.35 14.35,6.35 13.84,5.85 13.84,4.75 13.45,4.36 J10.28
BOOT_MODE1: length 5.2
  TOP w0.102: J10.26 13.05,4.08 arc(13.11,4.34) 13.26,4.57 arc(13.41,4.8) 13.46,5.07 13.46,5.84 14.22,6.6 SW1.1
BYP_CAP: length 1.5
  TOP w0.102: C20.1 6.53,29.72 6.35,29.72 5.98,29.35 U5.2
DBG_DA: length 2.4
  TOP w0.152: R8.1 7.49,10.57 7.87,10.95 8.51,10.95 8.67,11.11 U2.2
DBG_XTIN: length 3.2
  TOP w0.102: U2.43 5.62,16.13 5.5,16.01 R6.2 4.84,16.01 4.75,16.11 Y1.1
DBG_XTOUT: length 5.1
  TOP w0.102: U2.44 5.7,15.63 5.55,15.48 R6.1 4.88,15.15 4.88,13.64 4.34,13.1 Y1.3
DEBUG_V50: length 84.4
  TOP w0.254: R8.2 7.49,9.42 8.03,8.89 8.76,8.89 v1(9.27,9.4) ; v1(6.6,10.95) 6.6,11.28 6.43,11.46 5.83,11.46 R1.1 ; U2.4 9.67,11.17 9.4,10.9 9.17,11.12 U2.3 ; R7.2 v1(10.62,22.23) 10.67,22.17 U2.31 ; v1(17.53,14.73) 17.48,14.68 C3.1 16.76,14.35 16.55,14.13 U2.14 ; U2.42 5.67,16.63 C2.1 4.01,17.73 v1(3.96,17.78)
  TOP w0.305: 9.4,10.9 9.4,10.31 C7.1 9.27,10.13 v1(9.27,9.4)
  TOP w0.381: v1(11.38,22.23) 11.58,22.23 C1.1
  ART03 w0.381: v1(9.27,9.4) 10.77,10.9 10.77,20.85 11.38,21.46 v1(11.38,22.23) v1(10.62,22.23) ; v1(6.6,10.95) 7.04,11.38 8.59,11.38 9.09,11.89 9.09,18.97 8.79,19.28 5.46,19.28 v1(3.96,17.78)
  ART04 w0.508: v1(9.27,9.4) 7.72,10.95 v1(6.6,10.95)
  BOTTOM w0.381: J1.1 33.25,6.58 33.78,7.11 33.78,10.16 32,11.94 26.92,11.94 24.13,14.73 v1(17.53,14.73) 17.17,14.38 17.17,12.85 16.26,11.94 11.02,11.94 9.27,10.19 v1(9.27,9.4)
DSI_RESET: length 3.3
  TOP w0.102: C43.1 14.02,30.53 arc(14,30.53) 13.98,30.52 13.87,30.5 arc(13.84,30.49) 13.8,30.49 R30.2 13.28,30.49 v1(13.06,30.51)
  BOTTOM w0.102: J7.2 12.87,31.71 13.06,31.52 v1(13.06,30.51)
FT_RX1: length 5.3
  TOP w0.102: U1.6 14.42,22.5 14.15,22.23 14.15,19.02 14.54,18.63 U2.23
FT_RX2: length 27
  TOP w0.102: U1.11 v1(18.03,23.5) ; v1(6.73,19.94) 7.34,19.33 7.34,18.39 7.08,18.13 U2.39
  BOTTOM w0.102: v1(18.03,23.5) 17.65,23.5 17.22,23.93 17.22,26.14 16.21,27.15 14.22,27.15 13.84,27.53 10.06,27.53 9.32,26.8 6.12,26.8 4.98,25.65 4.98,24.87 5.16,24.69 5.16,22.66 6.35,21.46 6.35,20.32 v1(6.73,19.94)
FT_TX1: length 9.8
  TOP w0.102: U1.2 14.14,24.49 14,24.64 14,25.12 v1(13.59,25.53) ; v1(14.73,19.81) 14.5,19.58 14.5,19.25 14.62,19.13 U2.24
  ART03 w0.102: v1(13.59,25.53) 14.99,24.13 14.99,20.07 v1(14.73,19.81)
FT_TX2: length 27.8
  TOP w0.102: U2.40 7.17,17.63 7.62,18.08 7.62,19.94 v1(6.73,20.83) ; v1(18.03,22.48) 18.02,22.5 U1.9
  BOTTOM w0.102: v1(18.03,22.48) 16.92,23.6 16.92,26.04 16.05,26.9 14.12,26.9 13.72,27.3 10.24,27.3 9.47,26.54 6.19,26.54 5.21,25.56 5.21,25.04 5.44,24.82 5.44,22.78 6.73,21.49 v1(6.73,20.83)
GY_INT_B: length 25.3
  TOP w0.102: v1(10.16,35.2) 10.38,35.42 U6.3 ; D1.6 3.79,22.72 3.81,22.73 v1(3.81,22.99)
  BOTTOM w0.102: v1(3.81,22.99) 3.33,23.47 1.77,23.47 1.27,23.97 1.27,27.83 0.94,28.16 0.94,28.63 2.54,30.23 2.54,34.83 3.14,35.43 4.93,35.43 5.38,35.89 7.7,35.89 7.92,35.66 9.7,35.66 v1(10.16,35.2)
HPL_OUT: length 27.3
  TOP w0.203: U7.4 6.75,33.08 7.14,32.69 7.57,32.69 7.8,32.46 v1(7.8,32.33)
  TOP w0.254: J5.4 v1(28.7,31.24)
  ART03 w0.203: v1(28.7,31.24) 23.11,31.24 18.95,35.41 12.5,35.41 11.13,34.04 9.5,34.04 9,33.54 8.52,33.54 7.8,32.82 v1(7.8,32.33)
HPR_OUT: length 32.8
  TOP w0.203: v1(5.08,33.15) 5.2,33.03 5.34,33.03 5.55,33.24 U7.1
  TOP w0.254: v1(32.5,34.99) J5.3
  ART03 w0.203: v1(5.08,33.15) 6.43,33.15 7.67,34.39 7.67,34.62 8.33,35.28 9.07,35.28 9.58,34.77 10.87,34.77 12.19,36.09 19.34,36.09 20.45,34.99 23.48,34.99 23.7,35.2 32.28,35.2 v1(32.5,34.99)
I2C2_SCL: length 38.4
  TOP w0.102: J11.14 10.28,24.63 v1(10.29,24.64) ; U8.1 0.93,10.78 0.81,10.9 0.81,12.47 v1(1.24,12.9) ; v1(3.98,7.85) 3.98,7.49 3.43,6.93 2.92,6.93 2.59,7.26 2.21,7.26 2.06,7.11 1.92,7.11 R34.1
  ART03 w0.102: v1(1.24,12.9) 1.78,12.37 1.78,11.63 1.3,11.15 1.3,10.36 2.31,9.35 2.31,8.43 1.93,8.05 1.93,7.49 2.15,7.26 2.47,7.26 3.05,7.85 v1(3.98,7.85) 3.98,8.4 5.23,9.65 7.21,9.65 8.23,10.67 8.76,10.67 9.7,11.61 9.7,20.17 8.64,21.23 8.64,23.14 9.84,24.35 9.99,24.35 v1(10.29,24.64)
  BOTTOM w0.102: U9.3 4.21,8.36 4.35,8.23 4.35,8.03 4.17,7.85 v1(3.98,7.85)
I2C2_SDA: length 29.6
  TOP w0.102: U8.8 5.78,10.78 v1(5.94,10.95) ; v1(2.31,7.65) 2.24,7.57 R33.1 ; J11.13 v1(10.28,26.16)
  ART03 w0.102: v1(2.31,7.65) 2.92,8.26 3.51,8.26 5.66,10.41 5.66,10.67 v1(5.94,10.95) 6.4,10.49 7.67,10.49 8.1,10.92 8.69,10.92 9.47,11.71 9.47,19.81 7.87,21.41 7.87,23.14 8.32,23.59 8.56,23.59 9.91,24.94 9.91,25.79 v1(10.28,26.16)
  BOTTOM w0.102: U9.5 2.16,8.36 2.03,8.24 2.03,7.92 v1(2.31,7.65)
I2C3_SCL: length 28
  TOP w0.102: v1(7.24,24.64) 7.62,25.02 7.62,26.34 7.48,26.48 J11.27
  BOTTOM w0.102: v1(7.24,24.64) 7.24,24 7.87,23.37 7.87,22.63 9.47,21.03 10.57,21.03 14.07,17.53 26.49,17.53 J4.5
I2C3_SDA: length 26.3
  TOP w0.102: J11.26 7.85,23.82 7.85,23.32 7.87,23.29 7.87,22.61 v1(7.49,22.23)
  BOTTOM w0.102: v1(7.49,22.23) 7.92,22.23 9.35,20.8 10.46,20.8 14.12,17.14 24.33,17.14 J4.6
I2C4_SCL: length 59.1
  TOP w0.102: v1(13.46,31.75) 13.71,32 U6.11 ; v1(9.27,4.83) 9.45,4.64 J10.8 ; v1(8.76,32.36) 8.54,32.14 U4.8 ; U7.19 4.34,34.52 4.24,34.62 3.76,34.62 v1(3.3,34.16) ; v1(5.97,31.5) 6.25,31.22 6.25,30.58 6.01,30.34 U5.4
  ART03 w0.102: v1(8.76,32.36) 10.11,31.01 10.29,31.01 11.05,30.26 11.05,27.2 11.48,26.77 11.48,24.51 10.16,23.19 10.16,22.76 9.83,22.43 9.83,20.98 10.16,20.65 10.16,11.38 8.66,9.88 8.66,9.04 8.89,8.81 8.89,5.21 v1(9.27,4.83)
  BOTTOM w0.102: v1(3.3,34.16) 2.92,33.78 2.92,31.85 3.92,30.85 3.92,30.24 4.27,29.9 4.95,29.9 5.97,30.91 v1(5.97,31.5) 5.97,32.16 6.55,32.74 8.38,32.74 v1(8.76,32.36) 9.45,31.67 9.73,31.67 12.75,28.65 13.69,28.65 14.1,29.06 14.1,31.11 v1(13.46,31.75)
I2C4_SDA: length 60.1
  TOP w0.102: U5.6 v1(4.44,30.35) ; J10.7 v1(9.45,1.65) ; v1(9.91,32.36) 9.79,32.24 U4.7 ; v1(4.06,35.05) 4.19,34.92 U7.18 ; v1(13.49,31.06) 13.94,31.52 13.94,32.03 14.21,32.29 U6.12
  ART03 w0.102: v1(9.45,1.65) 9.02,2.09 9.02,3.56 9.65,4.19 9.65,8.46 8.89,9.22 8.89,9.75 10.39,11.25 10.39,21.08 10.16,21.31 10.16,22.31 10.46,22.61 10.7,22.61 10.92,22.83 10.92,23.52 11.71,24.31 11.71,26.97 11.28,27.41 11.28,30.53 9.91,31.9 v1(9.91,32.36)
  BOTTOM w0.102: v1(13.49,31.06) 13.84,30.71 13.84,29.13 13.67,28.96 12.8,28.96 9.91,31.85 v1(9.91,32.36) 9.3,32.97 6.4,32.97 5.46,32.03 5.46,30.86 4.95,30.35 v1(4.44,30.35) 4.44,31 3.68,31.75 3.68,34.67 v1(4.06,35.05)
JT_PWR: length 22
  TOP w0.102: v1(36.83,24.13) 34.92,22.23 25.78,22.23 24.13,20.57 R12.1
  BOTTOM w0.102: J2.1 v1(36.83,24.13)
JTAG_MOD: length 1.7
  TOP w0.102: R15.1 8.5,22.59 8.64,22.73 8.64,23.19 8.68,23.23 J11.22
JTAG_TCK: length 38.3
  TOP w0.102: J11.18 9.48,24.46 9.3,24.64 v1(9.07,24.64)
  ART03 w0.102: v1(33.66,22.86) 33.15,23.37 33.15,26.16 31.24,28.07 26.67,28.07 19.81,21.21 v1(19.81,20.07)
  BOTTOM w0.102: v1(9.07,24.64) 10.16,23.55 10.16,22.81 10.36,22.61 10.79,22.61 11,22.4 11,22.05 12.22,20.83 14.43,20.83 15.11,20.14 15.11,19.61 15.67,19.05 19.18,19.05 19.81,19.68 v1(19.81,20.07) ; J2.9 v1(33.66,22.86)
JTAG_TDI: length 37.7
  TOP w0.102: v1(33.66,20.32) 32,21.97 26.54,21.97 24.64,20.07 v1(20.83,20.07) 20.45,19.68 19.43,19.68 19.18,19.94 R10.1 ; J11.21 8.68,25.31 v1(8,24.64)
  BOTTOM w0.102: J2.7 v1(33.66,20.32) ; v1(20.83,20.07) 19.51,18.75 15.21,18.75 13.51,20.45 12.27,20.45 10.97,21.74 10.39,21.74 9.4,22.73 9.4,23.24 v1(8,24.64)
JTAG_TDO: length 32.9
  TOP w0.102: v1(9.14,27.69) 9.08,27.62 J11.19
  ART03 w0.102: v1(18.03,27.43) 25.15,27.43 26.26,28.55 31.5,28.55 34.16,25.88 34.16,22.1 v1(33.66,21.59)
  BOTTOM w0.102: J2.8 v1(33.66,21.59) ; v1(18.03,27.43) 14.27,27.43 13.94,27.76 9.8,27.76 9.72,27.69 v1(9.14,27.69)
JTAG_TMS: length 32.2
  TOP w0.102: J11.17 9.48,26.29 9.35,26.16 v1(9.07,26.16) ; R11.1 17.78,21.21 v1(18.03,21.46) 23.85,21.46 26.9,24.51 33.27,24.51 v1(33.66,24.13)
  BOTTOM w0.102: v1(9.07,26.16) 9.55,26.16 10.31,26.92 11.4,26.92 12.42,25.91 14.96,25.91 16.26,24.61 16.26,23.24 v1(18.03,21.46) ; J2.10 v1(33.66,24.13)
JTAG_TRST_B: length 13.5
  TOP w0.102: R18.1 16.46,18.67 16.31,18.82 16.31,19.51 v1(16,19.81) ; J11.15 9.88,26.21 v1(9.07,25.4)
  BOTTOM w0.102: v1(16,19.81) 16,20.35 13.74,22.61 11.13,22.61 10.92,22.81 10.92,23.32 9.73,24.51 9.73,24.74 v1(9.07,25.4)
LCD_BK_CTL: length 37.8
  TOP w0.102: v1(9.4,2.41) 9.05,2.07 J10.5 ; R39.2 v1(17.53,26.92)
  ART03 w0.102: v1(19.18,3.3) 19.18,4.01 19.3,4.14 19.3,25.15 v1(17.53,26.92)
  BOTTOM w0.102: v1(9.4,2.41) 9.4,2.79 10.31,3.71 15.88,3.71 16.29,3.3 17.65,3.3 18.16,3.81 18.67,3.81 v1(19.18,3.3)
LEDK: length 6.9
  TOP w0.102: v1(15.88,31.75) 16.13,31.5 Q5.3
  BOTTOM w0.102: J7.13 16.17,34.89 15.87,34.59 J7.12 15.87,31.76 v1(15.88,31.75) 16.28,31.75 16.47,31.94 J7.14
MIC: length 1.6
  TOP w0.203: U7.10 8.32,35.73 8.71,35.33 C29.2
MIC_BIAS: length 2.6
  TOP w0.178: C32.1 8.49,36.98 8.28,36.98 8.08,36.78 7.32,36.78 7.15,36.61 U7.11
  TOP w0.203: R26.1 9.26,37.11 C32.1
MIPI_DSI_CLK_N: length 38.5
  TOP w0.104: v1(15.09,4.88) 15.09,5.11 14.96,5.23 14.71,5.23 14.57,5.09 14.57,4.41 14.65,4.32 J10.34
  ART03 w0.104: v1(14.07,33.94) 14.29,34.15 14.49,34.15 14.58,34.06 14.58,33.76 12.42,31.6 12.42,28.76 12.85,28.33 12.85,23.55 14.1,22.3 14.1,21.26 13.82,20.97 13.82,18.18 13.69,18.05 13.69,12.99 14.35,12.32 14.35,11.63 14.15,11.43 13.84,11.43 13.54,11.12 13.54,9.12 14.76,7.9 15.4,7.9 15.62,7.67 15.62,6.8 15.35,6.53 14.81,6.53 14.35,6.06 14.35,5.34 14.59,5.1 14.86,5.1 v1(15.09,4.88)
  BOTTOM w0.104: v1(14.07,33.94) 14.67,33.35 J7.8
MIPI_DSI_CLK_P: length 38.5
  TOP w0.104: v1(15.09,5.59) 14.96,5.46 14.61,5.46 14.34,5.19 14.34,4.39 14.25,4.31 J10.32
  ART03 w0.104: v1(15.09,5.59) 14.83,5.33 14.68,5.33 14.58,5.44 14.58,5.97 14.91,6.3 15.44,6.3 15.85,6.71 15.85,7.77 15.49,8.13 14.86,8.13 13.77,9.22 13.77,11.03 13.94,11.2 14.24,11.2 14.58,11.54 14.58,12.42 13.92,13.08 13.92,17.96 14.05,18.08 14.05,20.88 14.33,21.16 14.33,22.4 13.08,23.65 13.08,28.42 12.65,28.85 12.65,31.5 14.81,33.66 14.81,34.16 14.59,34.39 14.31,34.39 v1(14.07,34.62)
  BOTTOM w0.104: J7.7 14.37,34.91 14.53,34.75 14.53,34.59 14.38,34.44 14.25,34.44 v1(14.07,34.62)
MIPI_DSI_D0_N: length 39.1
  TOP w0.104: J10.29 13.85,1.4 13.75,1.5 13.75,1.74 14.2,2.19 14.2,2.66 13.94,2.92 13.71,2.92 v1(13.46,3.17)
  ART03 w0.104: v1(12.93,34.57) 13.16,34.34 13.43,34.34 13.64,34.13 13.64,33.61 11.99,31.95 11.99,28.37 12.42,27.93 12.42,22.58 12.9,22.1 12.9,7.95 13.82,7.03 13.82,4.55 12.95,3.68 12.95,3.12 13.08,3 13.29,3 v1(13.46,3.17)
  BOTTOM w0.104: J7.5 13.77,34.88 13.64,34.75 13.64,34.49 13.44,34.29 13.21,34.29 v1(12.93,34.57)
MIPI_DSI_D0_P: length 39.1
  TOP w0.104: J10.27 13.45,1.52 13.52,1.59 13.52,1.84 13.97,2.29 13.97,2.57 13.85,2.69 13.7,2.69 v1(13.46,2.45)
  ART03 w0.104: v1(12.93,33.86) 13.18,34.11 13.34,34.11 13.41,34.03 13.41,33.7 11.76,32.05 11.76,28.27 12.19,27.84 12.19,22.48 12.67,22 12.67,7.85 13.59,6.94 13.59,4.64 12.72,3.78 12.72,3.03 12.98,2.77 13.34,2.77 13.46,2.64 v1(13.46,2.45)
  BOTTOM w0.104: v1(12.93,33.86) 13.13,34.06 13.34,34.06 13.47,33.93 J7.4
MKBUS_ESPI3_MISO: length 35
  TOP w0.102: v1(11.56,3.3) 12.06,2.79 12.06,1.6 11.85,1.39 J10.19
  ART03 w0.102: J3.5 29.97,16.89 27.05,16.89 25.65,15.49 25.65,7.32 19.61,1.27 13.64,1.27 12.9,2.01 12.52,2.01 12.32,2.21 12.32,2.54 v1(11.56,3.3)
MKBUS_ESPI3_MOSI: length 32.4
  TOP w0.102: J10.16 11.05,4.7 v1(11.18,4.83)
  ART03 w0.102: J3.6 29.84,11.94 27.43,11.94 26.72,11.23 26.72,7.04 20.24,0.56 11.81,0.56 11.18,1.19 v1(11.18,4.83)
MKBUS_ESPI3_SCLK: length 37
  TOP w0.102: v1(11.56,2.41) 11.05,1.91 J10.15
  ART03 w0.102: v1(11.56,2.41) 11.94,2.03 11.94,1.37 12.42,0.89 19.94,0.89 26.11,7.06 26.11,13.41 27.18,14.48 32.03,14.48 32.41,14.86 32.41,16.99 J3.4
MKBUS_ESPI3_SS0_B: length 39.8
  TOP w0.102: J10.14 10.65,5.06 v1(11.18,5.59)
  ART03 w0.102: J3.3 29.72,22.23 29.72,23.5 28.7,24.51 26.92,24.51 22.1,19.68 v1(22.1,6.73)
  BOTTOM w0.102: v1(22.1,6.73) 21.62,7.21 19.74,7.21 19.46,6.93 12.52,6.93 v1(11.18,5.59)
MKBUS_INT: length 34.1
  TOP w0.102: J10.21 12.25,1.38 12.32,1.45 12.32,2.03 v1(12.7,2.41)
  ART03 w0.102: v1(12.7,2.41) 12.95,2.41 13.34,2.03 14.45,2.03 14.81,1.68 19.51,1.68 25.27,7.44 25.27,20.37 J4.2
MKBUS_PWM2: length 33.5
  TOP w0.102: J10.22 12.25,4.28 arc(12.28,4.44) 12.37,4.58 arc(12.47,4.71) 12.5,4.87 12.5,5.13 v1(12.95,5.59)
  ART03 w0.102: v1(21.29,6.73) 21.29,20.35 26.85,25.91 J4.1
  BOTTOM w0.102: v1(21.29,6.73) 20.9,6.35 13.72,6.35 v1(12.95,5.59)
MKBUS_RST: length 41.3
  TOP w0.102: J10.18 11.45,4.52 11.56,4.62 11.56,5.08 v1(12.06,5.59)
  ART03 w0.102: v1(20.32,6.73) 20.32,20.62 27.38,27.69 29.08,27.69 29.72,27.05 29.72,24.77 J3.2
  BOTTOM w0.102: v1(12.06,5.59) 13.08,6.6 19.58,6.6 19.71,6.73 v1(20.32,6.73)
MKBUS_UART5_RXD: length 27.4
  TOP w0.102: v1(8,25.4) 8.45,25.84 8.45,26.28 8.28,26.44 J11.23
  BOTTOM w0.102: v1(8,25.4) 7.62,25.02 7.62,24.38 8.64,23.37 8.64,22.81 9.93,21.51 10.85,21.51 12.22,20.14 13.46,20.14 15.19,18.41 25.86,18.41 J4.3
MKBUS_UART5_TXD: length 23.2
  TOP w0.102: J11.24 8.28,23.01 v1(8.26,22.99)
  BOTTOM w0.102: v1(8.26,22.99) 8.26,22.68 9.65,21.29 10.69,21.29 12.1,19.88 13.37,19.88 15.21,18.03 26.21,18.03 26.47,18.29 J4.4
MX7_ONOFF: length 36.4
  TOP w0.102: J11.9 v1(11.08,26.16) ; S3.4 2.17,4.1 1.68,3.61 1.68,2.74 2.17,2.25 S3.2 2.88,1.38 3.01,1.51 3.01,1.71 3.25,1.95 C52.1 3.86,1.95 v1(4.17,1.65)
  ART03 w0.102: v1(4.17,1.65) 3.73,2.08 3.73,3.64 4.03,3.94 5.08,3.94 6.73,5.59 6.73,8.81 8.13,10.21 8.64,10.21 9.93,11.51 9.93,20.32 9.4,20.85 9.4,23.16 10.67,24.43 10.67,25.58 10.9,25.81 10.9,25.98 v1(11.08,26.16)
NOBAT: length 24.8
  TOP w0.152: v1(11.05,24.64) 11.88,25.47 J11.5
  TOP w0.203: R35.2 17.27,31.24 v1(17.4,31.11)
  BOTTOM w0.152: v1(11.05,24.64) 11.53,25.12 13.92,25.12 14.86,24.18 14.86,22.91 16.89,20.88 18.72,20.88 19.3,21.46 19.3,29.21 v1(17.4,31.11)
NTAG_FD_INT: length 31.9
  TOP w0.102: J11.11 10.68,25.79 v1(10.29,25.4) ; R32.1 2.08,6.35 2.36,6.63 v1(2.36,6.86)
  ART03 w0.102: v1(10.29,25.4) 10.29,25.63 10.66,26 10.66,26.32 10.44,26.54 8.91,26.54 8.61,26.24 8.61,24.66 7.11,23.16 7.11,22.07 6.89,21.84 5.66,21.84 3.53,19.71 3.53,17.53 1.96,15.95 1.96,14.17 0.86,13.08 0.86,10.41 2.08,9.19 2.08,8.53 1.7,8.15 1.7,7.37 2.06,7.01 2.21,7.01 v1(2.36,6.86)
  BOTTOM w0.102: U9.4 3.17,7.87 2.67,7.37 2.67,7.16 v1(2.36,6.86)
PERI_3V15: length 89.9
  TOP w0.203: C28.1 6.27,32.76 6.35,32.84 U7.3 ; C31.1 6.89,37.01 6.75,36.87 U7.12 ; R23.1 8.76,34.04 v1(8.71,33.99)
  TOP w0.229: v1(16.12,25.78) 15.85,25.78 15.67,25.96 C5.1 ; v1(16.12,25.78) 16.33,25.78 16.46,25.91 C6.1 ; v1(16.12,25.78) U1.14
  TOP w0.254: C19.1 7.7,27.81 v1(7.85,27.81) 7.85,27.82 7.86,27.81 8,27.81 8.54,28.35 U4.1 ; C47.1 1.93,8.49 v1(1.68,8.74) ; R27.2 1.59,24.27 v1(1.91,24.59) ; C37.1 3.91,2.62 v1(4.19,2.9) ; C22.1 16.38,34.88 v1(16.38,34.54) 16.26,34.43 U6.15 ; C28.1 6.76,32.38 v1(6.83,32.31) ; C35.1 15.03,31.67 v1(15.11,31.75) ; C15.1 1.57,27.35 v1(1.8,27.58) 2.62,27.58 2.74,27.46 3.25,27.46 3.44,27.64 U5.14 ; v1(6.02,10.03) 5.92,10.13 C44.1 5.36,10.28 U8.7 ; C31.1 v1(6.35,37.29) ; R13.2 5.33,5.71 v1(5.46,5.84) ; C14.1 1.88,26.14 v1(1.91,26.16) 2.11,26.37 C13.1 ; C23.1 16.28,37.34 v1(16.15,37.21) 16,37.06 16,36.17 15.76,35.92 U6.18 14.41,35.92 14.25,35.76 14.25,35.56 14.38,35.42 U6.17 ; v1(0.76,6.22) 0.89,6.35 R32.2 ; U5.1 5.67,28.85 5.84,28.68 v1(5.84,28.15) C16.1 ; R33.2 R34.2 v1(0.76,6.99)
  TOP w0.381: J3.7 29.84,11.94 19.43,11.94 18.8,11.3 v1(18.03,11.3) 17.98,11.35 C26.1 ; U4.4 12.29,28.35 12.8,27.84 C17.1 v1(14.43,27.84)
  ART03 w0.508: v1(16.12,25.78) 16.12,26.14 v1(14.43,27.84) ; v1(16.38,34.54) 16.15,34.54 15.77,34.16 15.77,32.66 15.11,32 v1(15.11,31.75)
  POWER05 w0.381: v1(6.35,37.29) 7.7,35.94 7.7,35 v1(8.71,33.99)
  POWER05 w0.508: v1(16.15,37.21) 16.38,36.98 v1(16.38,34.54) ; v1(8.71,33.99) 8.18,33.45 7.98,33.45 v1(6.83,32.31)
  BOTTOM w0.178: v1(1.68,8.74) 1.8,8.86 U9.6
  BOTTOM w0.254: J8.6 3.51,3.65 3.76,3.4 3.76,3.33 v1(4.19,2.9)
  BOTTOM w0.305: v1(15.11,31.75) 15.27,31.91 J7.10 ; v1(16.15,37.21) 16.15,36.75 15.57,36.17 J7.11
  BOTTOM w0.381: v1(18.03,11.3) 11.48,11.3 9.96,9.78 9.96,9.22 9.37,8.64 v1(7.49,8.64)
  BOTTOM w0.432: v1(15.11,31.75) 15.11,28.52 v1(14.43,27.84) 14.07,28.19 10.01,28.19 9.58,28.63 8,28.63
  vias: v1(7.49,8) v1(7.75,1.65) v1(7.75,1.02)
PMIC_5V0: length 18.5
  TOP w0.635: J4.7 v1(24.77,10.67)
  ART03 w0.635: v1(14.99,2.41) 15.16,2.24 19.18,2.24 24.77,7.82 v1(24.77,10.67)
PMIC_PWR:
  vias: v1(4.57,27.05) v1(4.57,26.29) v1(6.73,1.65) v1(6.73,0.89)
PMIC_PWRON: length 11.2
  TOP w0.102: J11.25 7.88,26.46 8,26.34 v1(8,26.16) ; R25.2 C30.1 0.96,30.91 1.02,30.98 R40.1 v1(1.27,30.35)
  ART04 w0.102: v1(1.27,30.35) 2.01,29.62 2.51,29.62 3.68,28.45 4.93,28.45 5.77,27.61 6.55,27.61 v1(8,26.16)
POR_B: length 37
  TOP w0.102: R19.1 16.41,18.03 16.28,17.91 16.28,16.23 v1(16.51,16) ; R25.1 0.69,29.26 v1(0.74,29.21) ; v1(11.05,25.4) 11.48,25.83 J11.7
  ART04 w0.102: v1(11.05,25.4) 10.67,25.78 7.04,25.78 6.83,25.98 6.83,26.57 6.1,27.3 5.69,27.3 4.88,28.12 3.45,28.12 2.36,29.21 v1(0.74,29.21)
  BOTTOM w0.102: v1(11.05,25.4) 10.67,25.78 7.01,25.78 6.81,25.58 6.81,23.95 7.11,23.65 7.11,22.05 7.32,21.84 7.92,21.84 9.19,20.57 10.34,20.57 14.14,16.78 15.74,16.78 v1(16.51,16)
SENSOR_INT_B: length 29.4
  TOP w0.102: v1(5.84,21.34) 5.1,20.59 D1.3 5.1,19.4 4.98,19.28 4.55,19.28 4.45,19.38 D1.2 4.45,20.75 4.29,20.9 3.96,20.9 3.79,20.74 D1.1 ; v1(10.16,5.59) 9.78,5.21 9.78,4.62 9.85,4.55 J10.10
  ART04 w0.102: v1(5.84,21.34) 6.3,21.79 9.17,21.79 11.68,19.28 11.68,12.83 12.24,12.27 12.24,9.14 11.76,8.66 11.76,7.19 v1(10.16,5.59)
SW2_1V8: length 78.7
  TOP w0.178: 4.89,33.77 U7.20 4.28,34.12
  TOP w0.254: R30.1 13.59,29.59 v1(13.46,29.46) ; v1(15.49,10.41) 15.48,10.43 R36.2 R37.2 ; R9.2 R10.2 R12.2 R11.2 16.75,21.83 v1(16.76,21.84) ; v1(11.02,37.19) 11,37.21 10.44,37.21 10.36,37.13 C41.1 ; v1(4.19,5.08) 4.06,5.21 R29.1 R28.1 ; U8.3 2,9.78 2.62,9.17 C45.1 2.62,8.14 arc(2.64,8.03) 2.7,7.94 2.83,7.78 arc(2.94,7.64) 3.06,7.5 v1(3.22,7.34)
  TOP w0.279: R31.2 5.85,8.37 v1(5.97,8.26)
  TOP w0.305: v1(4.17,4.37) 4.04,4.49 C36.1
  ART03 w0.508: v1(4.06,33.55) 4.06,34.11 4.85,34.9 4.85,35.59 5.89,36.63 9.37,36.63 9.93,37.19 v1(11.02,37.19) ; v1(13.46,29.46) 14.1,30.1 14.91,30.1 15.65,29.36 15.65,27.91 16.76,26.8 v1(16.76,21.84) 17.65,20.95 17.65,18.87 18.29,18.24 18.29,13.28 15.49,10.49 v1(15.49,10.41) 15.49,9.96 16.97,8.48 16.97,4.9 v1(16.51,4.45) v1(16.51,3.81) ; v1(4.19,5.08) 3.22,6.05 v1(3.22,7.34) ; v1(4.19,5.08) 5.54,5.08 6.22,5.77 6.22,8 v1(5.97,8.26) ; v1(4.19,5.08) 4.17,5.05 v1(4.17,4.37)
  BOTTOM w0.254: J8.5 3.68,4.15
  BOTTOM w0.305: J7.1 12.57,35.97 12.52,36.01
  BOTTOM w0.381: 3.68,4.15 3.95,4.15
  BOTTOM w0.508: 4.52,4.22 15.39,4.22 15.62,4.45 v1(16.51,4.45) ; v1(11.02,37.19) 11.61,37.19 12.52,36.27 12.52,36.01
TOUCH_INT_B: length 10.3
  TOP w0.102: v1(9.27,5.59) 8.89,5.21 8.89,4.65 9.05,4.49 J10.6 ; v1(4.06,6.69) 3.64,6.69 3.43,6.48 R28.2
  BOTTOM w0.102: v1(9.27,5.59) 8.17,6.69 v1(4.06,6.69) 3.81,6.44 3.81,5.84 3.62,5.65 J8.2
TOUCH_RESET_B: length 3.7
  TOP w0.102: R29.2 4.33,6.11 4.65,6.43 C40.1 4.65,6.81 4.57,6.89 v1(4.57,7.24)
  BOTTOM w0.102: J8.1 3.31,6.15 3.48,6.32 3.48,6.68 4.04,7.24 v1(4.57,7.24)
TOUCH_SCL: length 6.5
  TOP w0.102: U8.4 0.9,9.28 0.76,9.14 v1(0.76,8.76)
  BOTTOM w0.102: v1(0.76,8.76) 1.73,7.8 1.73,5.26 2.34,4.65 J8.4
TOUCH_SDA: length 7.1
  TOP w0.102: U8.5 4,9.28 3.86,9.14 3.86,8.96 v1(4.8,8.02)
  BOTTOM w0.102: v1(4.8,8.02) 4.25,7.47 3.91,7.47 3.17,6.73 2.79,6.73 2.39,6.32 2.39,5.26 2.5,5.15 J8.3
UART1_RXD: length 5.3
  TOP w0.102: v1(11.3,22.99) 11.08,23.21 J11.10 ; v1(13.59,24.64) 14.23,23.99 U1.3
  BOTTOM w0.102: v1(11.3,22.99) 12.95,24.64 v1(13.59,24.64)
UART1_TXD: length 3.8
  TOP w0.102: U1.5 13.68,23 13.46,23.22 11.66,23.22 11.48,23.4 J11.8
UART2_RXD: length 24
  TOP w0.102: v1(16,20.95) 16.12,21.08 U1.8 ; J10.12 10.25,4.73 v1(10.16,4.83)
  ART03 w0.102: v1(10.16,4.83) 10.67,5.33 10.67,5.84 10.16,6.35 10.16,9.65 11.3,10.79 v1(11.3,13.21) ; v1(16,20.95) 15.6,20.55 v1(15.6,12.98)
  BOTTOM w0.102: v1(11.3,13.21) 11.81,12.7 15.32,12.7 v1(15.6,12.98)
UART2_TXD: length 33
  TOP w0.102: v1(10.67,2.41) 10.25,2 J10.11 ; U1.12 17.64,23.99 v1(18.03,24.38)
  ART03 w0.102: v1(18.03,24.38) 18.41,24 18.41,19.1 18.77,18.75 18.77,4.27 18.41,3.91 v1(18.41,2.92)
  BOTTOM w0.102: v1(10.67,2.41) 11.05,2.03 17.53,2.03 v1(18.41,2.92)
USB_DN: length 1.6
  TOP w0.14: U2.8 11.67,11.1 11.59,11.02 11.59,10.65 R2.2
USB_DP: length 2.2
  TOP w0.14: R4.2 R3.2 11.25,10.63 11.25,11.02 11.17,11.1 U2.7
USB_SUSPEND1_B: length 18.2
  TOP w0.102: v1(14.99,25.27) 15.47,25.27 15.63,25.12 U1.1 ; U1.4 13.84,23.5 v1(13.59,23.75) ; v1(16.64,13.63) U2.13
  ART03 w0.102: v1(14.99,25.27) 15.37,24.89 15.37,22.23 16.51,21.08 16.51,19.43 16,18.92 16,14.27 v1(16.64,13.63)
  ART04 w0.102: v1(14.99,25.27) 14.52,24.8 14.52,24.68 v1(13.59,23.75)
USB_SUSPEND2_B: length 21.1
  TOP w0.102: U1.10 18.17,23 18.47,23.29 18.47,24.84 v1(18.03,25.27) 17.86,25.1 17.86,24.77 17.59,24.49 U1.13 ; v1(11.94,21.84) 11.67,21.58 U2.29
  ART03 w0.102: v1(18.03,25.27) 18.54,25.27 18.92,24.89 v1(18.92,19.43)
  BOTTOM w0.102: v1(18.92,19.43) 15.84,19.43 15.49,19.78 15.49,20.32 14.55,21.26 12.52,21.26 v1(11.94,21.84)
USER_PB1: length 35.1
  TOP w0.102: v1(3.12,17.78) 3.12,18.04 2.95,18.21 S2.2 S2.4 ; J10.9 9.85,2.49 v1(10.67,3.3)
  ART03 w0.102: v1(10.67,3.3) 10.16,2.79 10.16,1.82 8.98,0.64 7.54,0.64 6.91,1.27 4.01,1.27 3.17,2.1 3.17,5.28 1.91,6.55 1.91,6.81 1.45,7.26 1.45,8.08 1.3,8.23 1.3,9.6 0.64,10.26 0.64,13.36 1.17,13.89 1.17,15.83 v1(3.12,17.78)
VREGD: length 2.8
  TOP w0.254: C25.1 16.38,36.37 16.38,35.99 16.13,35.74 16.13,35.2 15.85,34.92 U6.16
N02561: length 18.2
  TOP w0.305: R5.2 17.78,10.29 18.03,10.03 v1(18.03,8.26)
  TOP w0.508: v1(34.67,7.11) 34.04,6.48 29.72,6.48 v1(29.08,7.11)
  BOTTOM w0.305: v1(18.03,8.26) 18.52,8.26 18.69,8.08 25.32,8.08 26.8,6.6
N02599: length 22.4
  TOP w0.102: R14.1 24.64,17.4 26.62,19.38 32.31,19.38 33.07,18.62 34.62,18.62 36.32,20.32 v1(36.83,20.32)
  BOTTOM w0.102: J2.4 v1(36.83,20.32)
N02611: length 23.8
  TOP w0.102: v1(36.83,19.05) 36.2,19.05 35.23,18.08 35.23,17.2 32.64,14.61 26.8,14.61 24.64,16.76 R17.1
  BOTTOM w0.102: J2.5 v1(36.83,19.05)
N02693: length 19.5
  TOP w0.102: v1(33.66,19.05) 32.99,19.71 25.68,19.71 24,18.03 R19.2 R18.2 R9.1
  BOTTOM w0.102: J2.6 v1(33.66,19.05)
N03151: length 6.3
  TOP w0.305: U2.46 7.34,14.63 7.62,14.35 7.62,13.59 6.48,12.45 5.49,12.45 5.07,12.03 R1.2 4.42,11.68 C4.1
N03245: length 2.5
  TOP w0.152: R4.1 10.07,9.89 9.91,10.06 9.91,10.78 10.17,11.05 U2.5
N06963: length 2.2
  TOP w0.102: R23.2 9.92,34.32 9.83,34.41 C24.1 10.29,34.67 10.54,34.92 U6.4
